# Altium PCB MOBO_Rev2.PcbDoc (part 1 of 2)
Units mil, origin at the board's own origin, x right, y up, seen from the top; angles counter-clockwise.
Board outline 3000 x 2999.58 mil, 4 copper layers (Top Layer, Layer 1, Layer 2, Bottom Layer), stack 23.756 mil thick; 114 components, 91 nets, 741 pads, 25 vias.
Unrouted connection lines stored in the file: 474.
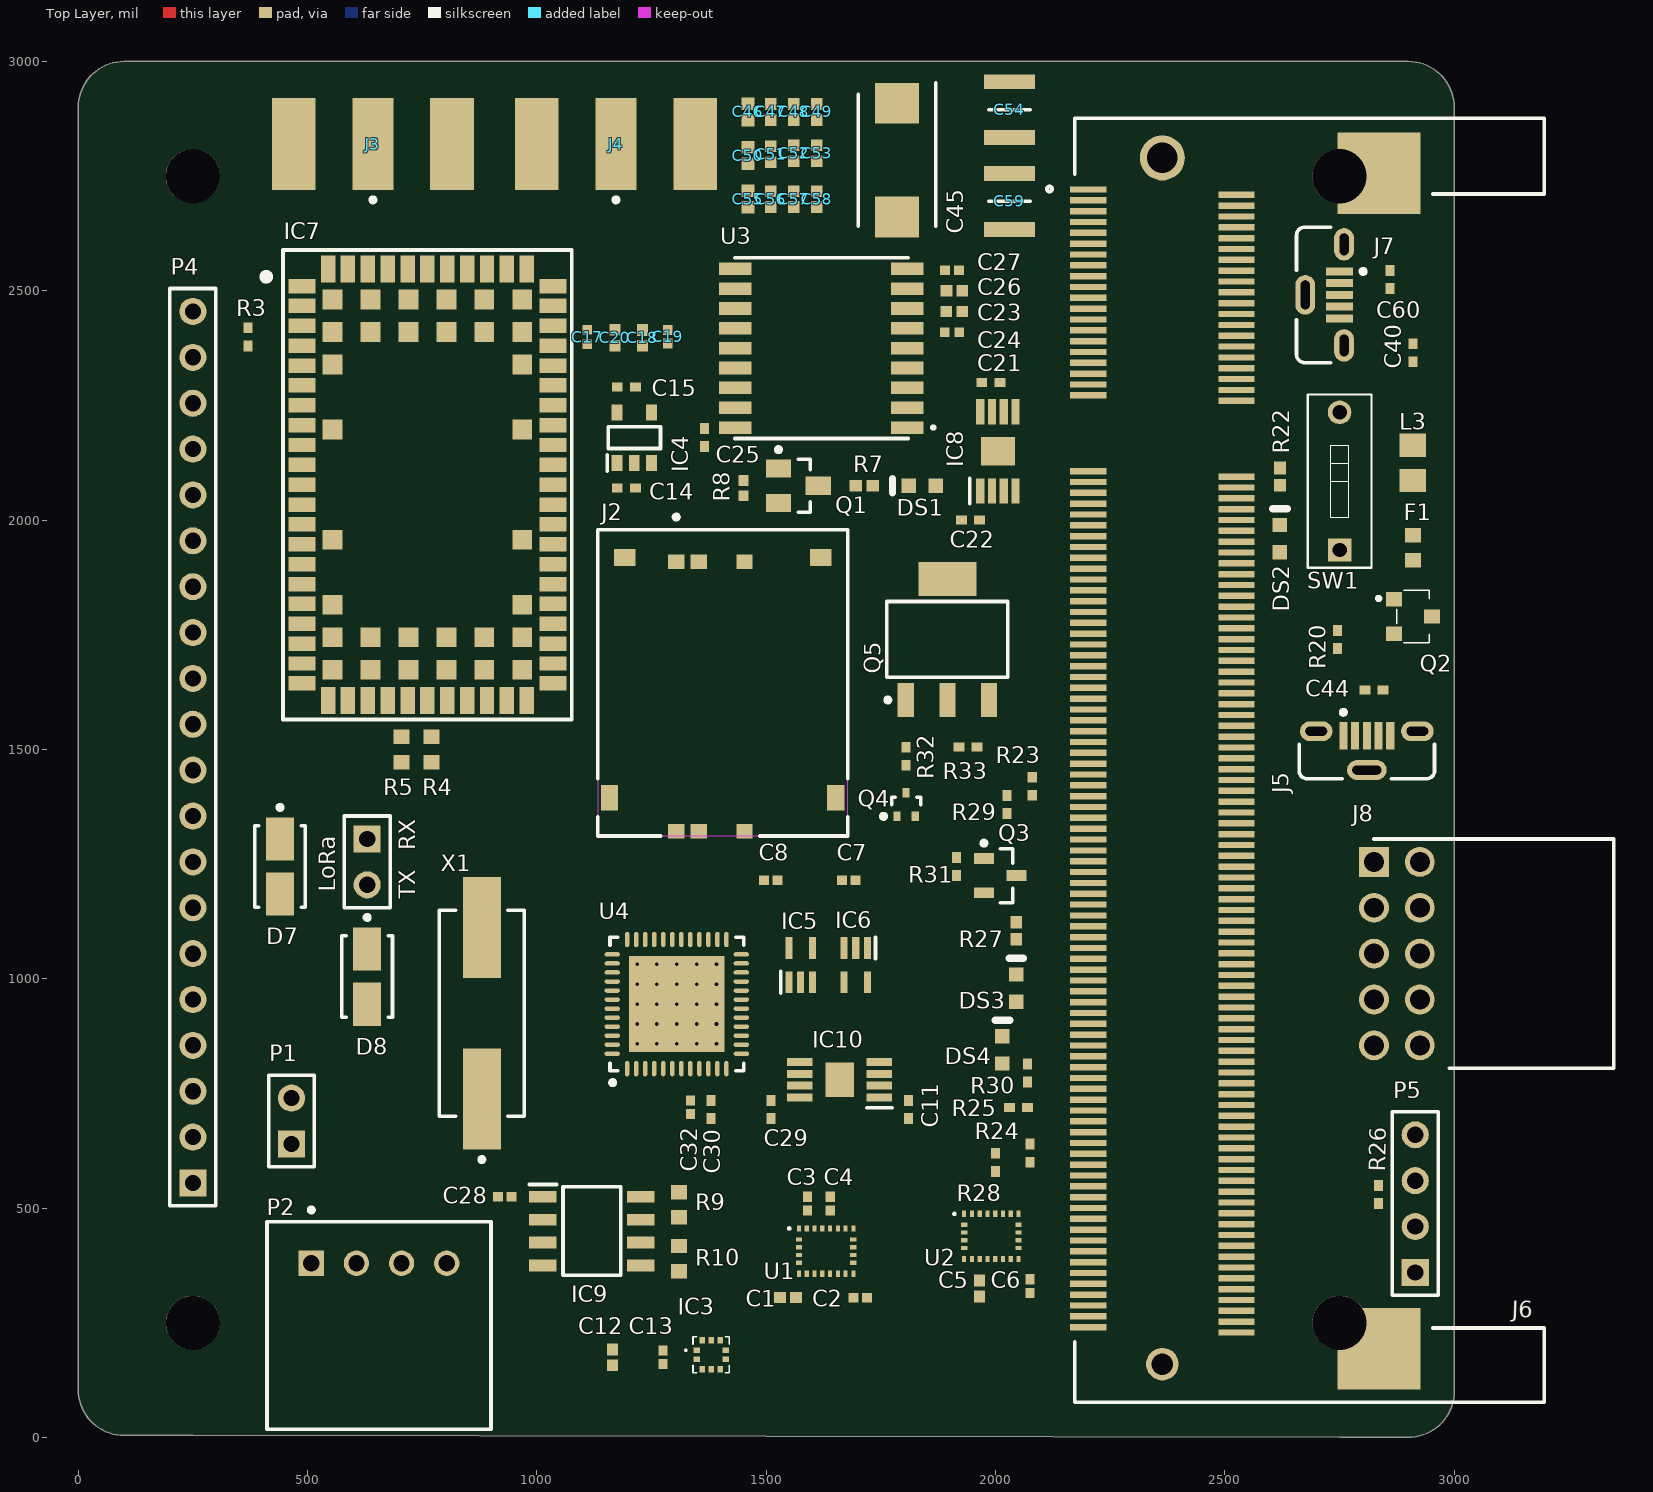
[diagram p0: Top Layer view]
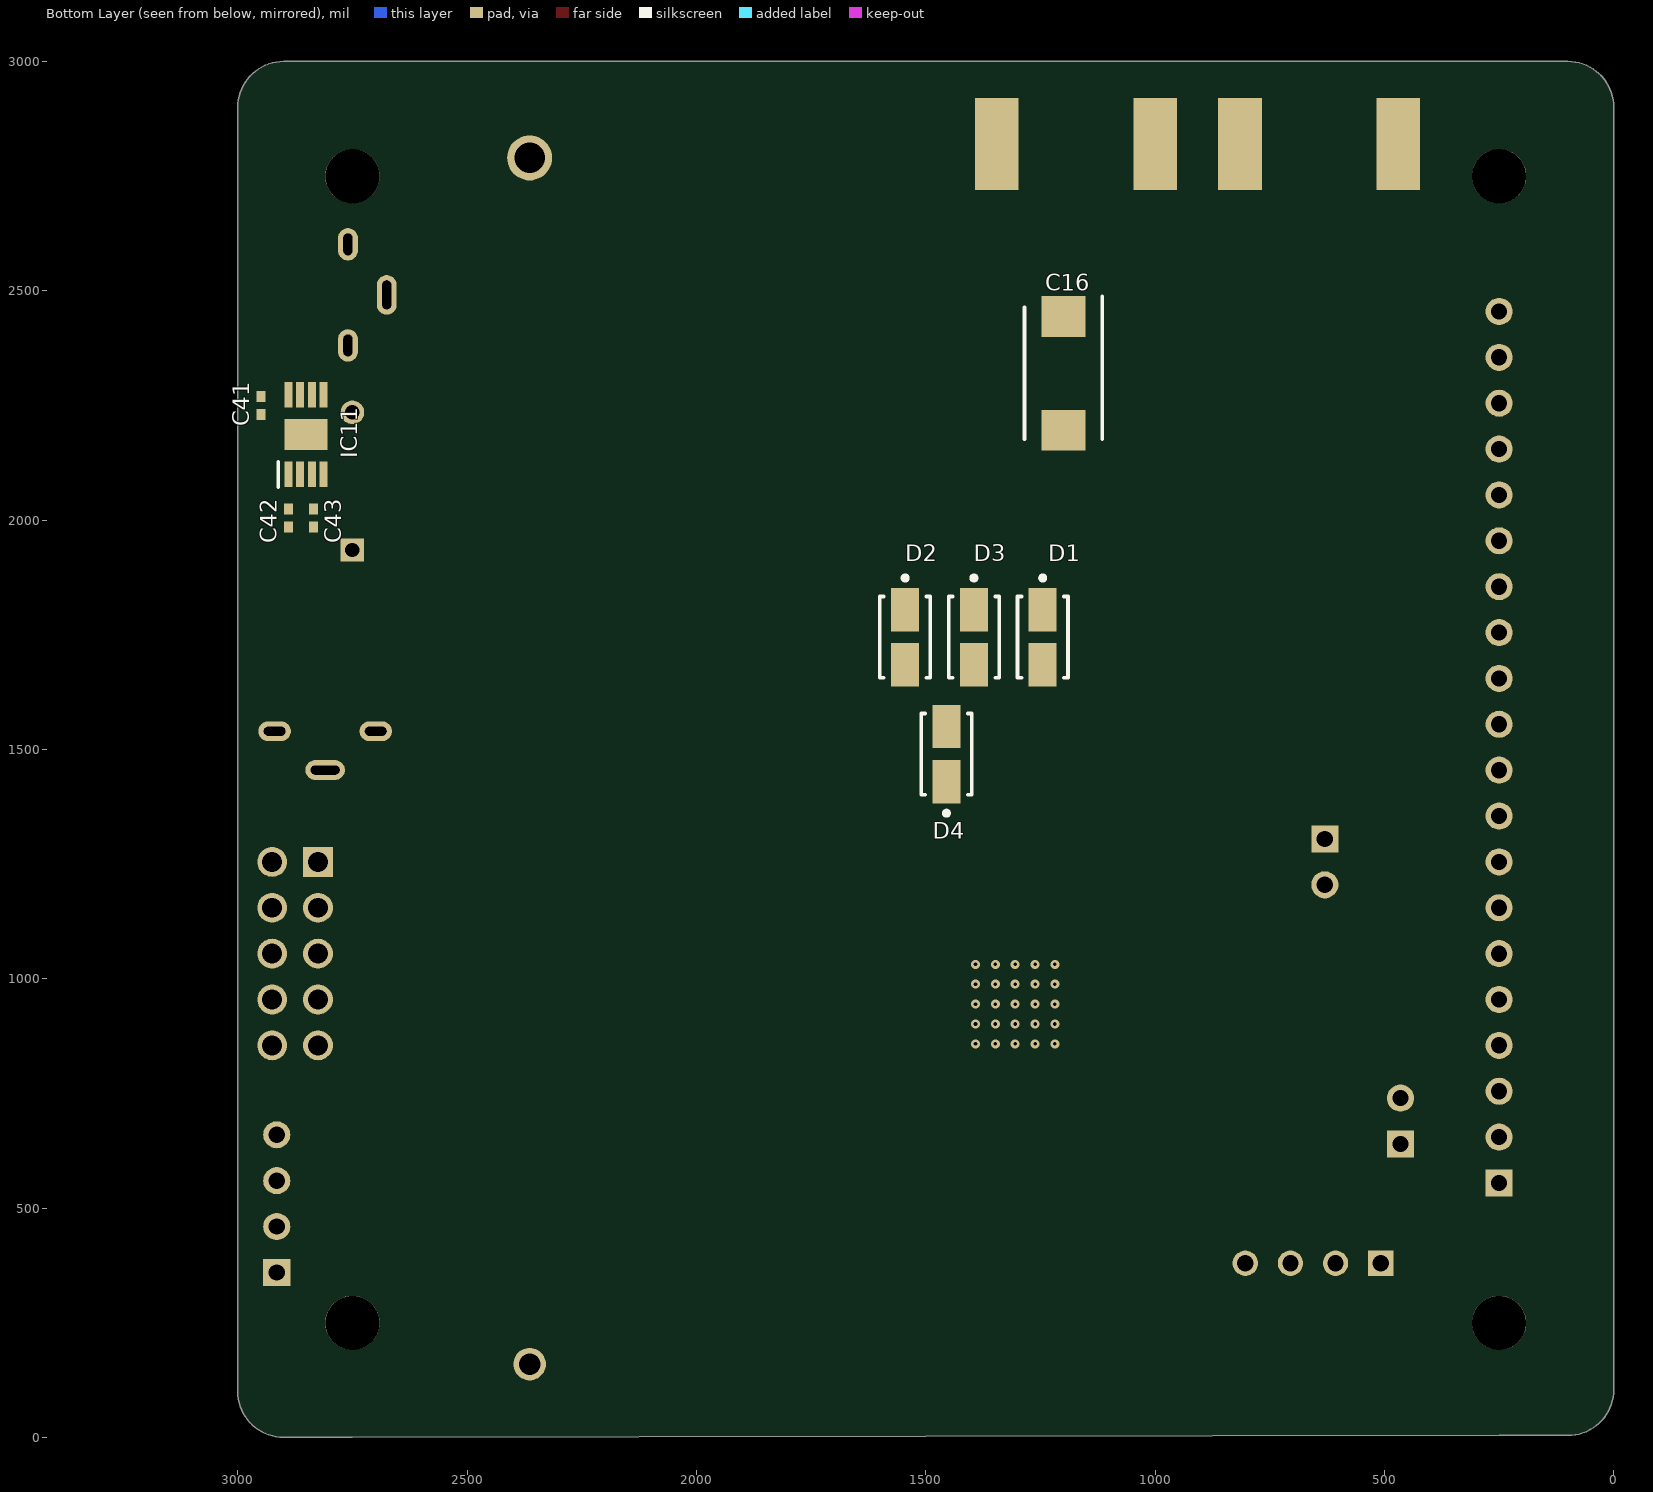
[diagram p1: Bottom Layer view, seen from below]

## Layer stack, top to bottom
Top Solder: solder mask 0.4, Solder Resist, Dk 3.5
Top Layer: signal copper 1.4
Dielectric 2: prepreg 2.8, PP-006, Dk 4.1
Layer 1: signal copper 1.378
Dielectric 1: dielectric 12.6, FR-4, Dk 4.8
Layer 2: signal copper 1.378
Dielectric 3: prepreg 2.8, PP-006, Dk 4.1
Bottom Layer: signal copper 1.4
Bottom Solder: solder mask 0.4, Solder Resist, Dk 3.5

## Board outline
2750,0.42 2900,0.42 ccw(c2900,100.42) 3000,100.42 3000,250 3000,2900 ccw(c2900,2900) 2900,3000 100,3000 ccw(c100,2900) 0,2900 0,104.58 ccw(c100,104.58) 100,4.58 250.01,4.58

## Design rules (kind name [scope] priority, off if disabled: settings)
Clearance [All] p1: gap=10 ignorepadtopadclearanceinfootprint=FALSE except(0: Arc-Hole Track-Hole SMDPad-Hole THPad-Hole Fill-Hole Poly-Hole Region-Hole Text-Hole; 5: Arc-Arc Arc-Track Track-Track SMDPad-SMDPad; 8: Arc-SMDPad Track-SMDPad SMDPad-Fill SMDPad-Poly SMDPad-Region; 22: Via-Hole)
HoleSize [All] p1: absolutevalues=TRUE maxlimit=100 minlimit=8 maxpercent=80.000 minpercent=20.000
PolygonConnect [All] p1: connectstyle=Relief reliefconductorwidth=10 reliefentries=4 polygonreliefangle="90 Angle" airgapwidth=10
RoutingVias [All] p1: holewidth=28 width=50 viastyle="Through Hole" minholewidth=28 minwidth=50 maxholewidth=28 maxwidth=50
SolderMaskExpansion [All] p1: expansion=4 istentingtop=FALSE
Width [All] p1: maxlimit=10 minlimit=10 preferedwidth=10
29 further rules are at their usual default settings.

## Classes and differential pairs
component class U_Power: C40 C41 C42 C43 C44 C45 C46 C47 C48 C49 C50 C51 C52 C53 C54 C55 C56 C57 C58 C59 DS2 F1 IC11 J5 L3 Q2 R20 R22 SW1
component class U_MAX14830ETM+: C11 C29 C30 C32 D7 D8 IC10 LoRa U4 X1
component class U_MAX3488AEGSA+: C28 IC9 P2 R9 R10
component class U_GPS_MAX-M8C-0-10: C21 C22 C23 C24 C25 C26 C27 DS1 IC8 J4 Q1 R7 R8 U3
component class U_Cell_SARA-G350-02S: C14 C15 C16 C17 C18 C19 C20 D1 D2 D3 D4 IC4 IC5 IC6 IC7 J2 J3 P1 R3 R4 R5
component class U_Barometer: C12 C13 IC3
component class U_Accelerometers: C1 C2 C3 C4 C5 C6 C7 C8 U1 U2
component class Top: C60 DS3 DS4 J6 J7 J8 P4 P5 Q3 Q4 Q5 R23 R24 R25 R26 R27 R28 R29 R30 R31 R32 R33

## Components (designator, comment, footprint, x,y, rotation, side; value= is the part's Value field where it differs from the comment)
C1 "GRM022R60J103KE19L" CAPC1005X55X25NL05T10 1547.68,305 r0 top
C2 "C0402C104Z4VAC7867" CAPC1005X60X30LL05T10 1704.96,305 r180 top
C3 "C0402C104Z4VAC7867" CAPC1005X60X30LL05T10 1590,510 r270 top
C4 "C0402C104Z4VAC7867" CAPC1005X60X30LL05T10 1640,510 r270 top
C5 "GRM022R60J103KE19L" CAPC1005X55X25NL05T10 1965,325 r90 top
C6 "C0402C104Z4VAC7867" CAPC1005X60X30LL05T10 2075,330.04 r90 top
C7 "C0402C104Z4VAC7867" CAPC1005X60X30LL05T10 1680,1215 r0 top
C8 "C0402C104Z4VAC7867" CAPC1005X60X30LL05T10 1510,1215 r0 top
C11 "CL05A106MP8NUB8" 0402 1810,715 r90 top value=10uF
C12 "GRM022R60J103KE19L" CAPC1005X55X25NL05T10 1165,175 r90 top
C13 "C0402C104Z4VAC7867" CAPC1005X60X30LL05T10 1275,175 r90 top
C14 "298D105X0010K2T" 0402 1195,2070 r180 top value=1uF
C15 "298D105X0010K2T" 0402 1195,2290 r180 top value=1uF
C16 "6TPC330MA" CAPPM7343X200N 1200,2320 r270 bottom
C17 "C0402C150J4GACTU" CAPC0402(1005)60_L 1110,2399.25 r90 top value=15pF
C18 "GRM022R60J103KE19L" CAPC1005X55X25NL05T10 1230,2397.68 r90 top
C19 "C0402C104Z4VAC7867" CAPC1005X60X30LL05T10 1285,2400.04 r90 top
C20 "C0402C560K5RACTU" CAPC1005X55N 1170,2397.68 r90 top
C21 "CL05A106MP8NUB8" 0402 1989.69,2300 r180 top value=10uF
C22 "CL05A106MP8NUB8" 0402 1945.31,2000 r0 top value=10uF
C23 "C0402C560K5RACTU" CAPC1005X55N 1910,2455 r0 top value=56pF
C24 "C0402C150J4GACTU" CAPC0402(1005)60_L 1905,2410 r0 top value=15pF
C25 "CL05A106MP8NUB8" 0402 1365,2180 r90 top value=10uF
C26 "GRM022R60J103KE19L" CAPC1005X55X25NL05T10 1910,2500 r180 top value=10nF
C27 "C0402C104Z4VACTU" CAPC1005X55X30LL05T10 1905,2545 r180 top value=100nF
C28 "C0402C104Z4VAC7867" CAPC1005X60X30LL05T10 930.04,525 r0 top
C29 "CL05A106MP8NUB8" 0402 1510,715 r90 top value=10uF
C30 "CL05A106MP8NUB8" 0402 1380,715.31 r90 top value=10uF
C32 "C0402C104Z4VAC7867" CAPC1005X60X30LL05T10 1335,720.04 r90 top
C40 "C1005X5R0J225M050BC" 0402 2910,2365 r270 top value=2.2uF
C41 "C1005X5R0J225M050BC" 0402 2949.49,2250 r90 bottom value=2.2uF
C42 "C1005X5R0J225M050BC" 0402 2889.49,2005 r90 bottom value=2.2uF
C43 "VJ0402Y104KXXCW1BC" 0402 2834.49,2005 r90 bottom value=100nF
C44 "CL05A106MP8NUB8" 0402 2825,1630 r180 top value=10uF
C45 "6TPC330MA" CAPPM7343X200N 1785,2785 r270 top value=330uF
C46 "C0402C150J4GACTU" CAPC1005X90N 1460,2890 r270 top value=15pF
C47 "C0402C560K5RACTU" CAPC1005X55N 1510,2890 r90 top value=56pF
C48 "C0402C103K8RACTU" CAPC1005X55N 1560,2890 r90 top value=10nF
C49 "C0402C104Z4VAC7867" CAPC1005X55N 1610,2890 r90 top value=100nF
C50 "C0402C150J4GACTU" CAPC1005X90N 1460,2795 r90 top value=15pF
C51 "C0402C560K5RACTU" CAPC1005X55N 1510,2797.68 r270 top value=56pF
C52 "C0402C103K8RACTU" CAPC1005X55N 1560,2800 r270 top value=10nF
C53 "C0402C104Z4VAC7867" CAPC1005X55N 1610,2800 r270 top value=100nF
C54 "GRM32ER60G337ME05L" CAPC3225X280N 2030,2895 r90 top value=330uF
C55 "C0402C150J4GACTU" CAPC1005X90N 1460,2700 r90 top value=15pF
C56 "C0402C560K5RACTU" CAPC1005X55N 1510,2700 r270 top value=56pF
C57 "C0402C103K8RACTU" CAPC1005X55N 1560,2700 r270 top value=10nF
C58 "C0402C104Z4VAC7867" CAPC1005X55N 1610,2700 r270 top value=100nF
C59 "GRM32ER60G337ME05L" CAPC3225X280N 2030,2695 r270 top value=330uF
C60 "CL05A106MP8NUB8" 0402 2860,2525 r270 top value=10uF
D1 "SMAJ30A-E3/61" VISH-DO-214AC-2_N 1245,1744.96 r270 bottom
D2 "SMAJ30A-E3/61" VISH-DO-214AC-2_N 1545,1745 r270 bottom
D3 "SMAJ30A-E3/61" VISH-DO-214AC-2_N 1395,1745 r270 bottom
D4 "SMAJ30A-E3/61" VISH-DO-214AC-2_N 1455,1490.04 r90 bottom
D7 "SMAJ30A-E3/61" VISH-DO-214AC-2_N 440,1245 r270 top
D8 "SMAJ30A-E3/61" VISH-DO-214AC-2_N 630,1005 r270 top
DS1 "HSMW-C191" AVAG-HSMW-C191_V 1840,2075 r180 top
DS2 "HSMW-C191" AVAG-HSMW-C191_V 2620,1960 r90 top
DS3 "HSMY-C190" AVAG-HSMX-C190_V 2045,980 r90 top
DS4 "HSMY-C190" AVAG-HSMX-C190_V 2015,845 r90 top
F1 "F0603E3R00FSTR" 1608[0603] 2910,1940 r90 top
IC3 "LPS22HDTR" LPS22HDTR 1380,180.48 r0 top
IC4 "XC6227C501MR-G" SOT95P280X130-5N 1212.4,2179.88 r90 top
IC5 "FXLP34P5X" SOT65P210X110-5N 1575,1030 r90 top
IC6 "FXLP34P5X" SOT65P210X110-5N 1695,1030 r270 top
IC7 "SARA-G350-02S" SARA-G350_1 446.38,1565.51 r0 top
IC8 "TPS7B8233QDGNRQ1" SOP65P490X110-9N 2005,2150 r90 top
IC9 "MAX3488AEGSA+" SOIC127P600X175-8N 1120,450 r0 top
IC10 "TPS7B8233QDGNRQ1" SOP65P490X110-9N 1660,780 r180 top
IC11 "MIC5357-SGYMME" SOP65P490X104-9N 2851.1,2186.61 r90 bottom
J2 "78800-0001" MOLX-78800-0001_V 1405,1620 r270 top
J3 "142-0701-801" CINC-142-0701-801_V 642.5,2820 r90 top
J4 "142-0701-801" CINC-142-0701-801_V 1172.5,2820 r90 top
J5 "105133-0001" MOLX-105133-0001_V 2809.41,1497.52 r0 top
J6 "1473005-4" 1473005-4_1 2363.58,1474.92 r90 top locked
J7 "105133-0001" MOLX-105133-0001_V 2717.52,2491.18 r270 top
J8 "SBH11-PBPC-D05-RA-BK" SHDRRA10W64P254_2X5_1270X910X880P 2825,1255 r270 top
L3 "MI0805K400R-10" LIRD-MI0805K400R-10_V 2910,2125 r90 top
LoRa "Header 2" HDR1X2 630,1305 r270 top
P1 "Header 2" HDR1X2 465,640 r90 top
P2 "S4B-XH-A(LF)(SN)" JST-S4B-XH-A(LF)(SN)_V 655.79,380 r0 top
P4 "Header 20" HDR1X20 250,555 r90 top locked
P5 "Header 4" HDR1X4 2915,360 r90 top
Q1 "FDV301N" FAIR-SOT23-3_V 1570,2075 r270 top
Q2 "SSM3J338R,LF" SSM3J332RLFT 2910,1790 r270 top
Q3 "2N7002P,215" NXP-SOT23_L 2010,1225 r0 top
Q4 "DMG1012T-7" DIOD-SOT523-3_V 1805,1380 r90 top
Q5 "BSP322P" INF-PG-SOT223_SC-73_M 1895,1740 r90 top
R3 "CRGP0402F100K" 0402 370,2399.69 r270 top value=100k
R4 "ESR03EZPJ332" 1608[0603] 770,1500 r270 top value=3.3K
R5 "ESR03EZPJ332" 1608[0603] 705,1500 r270 top value=3.3K
R7 "RC0402FR-07100RL" RESC1005X40X25ML05T10 1713.7,2075 r0 top
R8 "RC0402FR-07100KL" RESC1005X40X25NL05T10 1450,2070 r270 top
R9 "ESR03EZPJ121" 1608[0603] 1310,507.56 r270 top value=120
R10 "ESR03EZPJ121" 1608[0603] 1310,390 r90 top value=120
R20 "0402WGF1001TCE" 0402 2745,1740 r270 top value=1K
R22 "RC0402FR-07100RL" RESC1005X40X25ML05T10 2620,2095 r270 top
R23 "CRGP0402F100K" 0402 2080,1420 r90 top value=100k
R24 "CRGP0402F100K" 0402 2075,620 r90 top value=100k
R25 "0402WGF1801TCE" 0402 2050,720 r180 top value=1.8K
R26 "0402WGF1801TCE" 0402 2835,530 r270 top value=1.8K
R27 "RC0402FR-07100RL" RESC1005X40X25ML05T10 2045,1105 r270 top
R28 "CRGP0402F100K" 0402 2000,600 r90 top value=100k
R29 "CRGP0402F100K" 0402 2025,1380.31 r90 top value=100k
R30 "0402WGF1001TCE" 0402 2070,795 r90 top value=1K
R31 "CRGP0402F100K" 0402 1915,1245 r270 top value=100k
R32 "0402WGF1001TCE" 0402 1805,1485.31 r90 top value=1K
R33 "CRGP0402F100K" 0402 1940,1505 r0 top value=100k
SW1 "418117270901" 418117270901 2750,2085 r0 top
U1 "LSM9DS1TR" STM-LGA-24_3500X3000X1000 1630.75,406.54 r0 top
U2 "LSM9DS1TR" STM-LGA-24_3500X3000X1000 1990.75,438.46 r0 top
U3 "MAX-M8C-0-10" MAX-M8 1620,2375 r0 top
U4 "MAX14830ETM+" T4877+3_M 1305,945 r90 top
X1 "LFXTAL003260" ABRA-ABLS2-2_V 880,925 r90 top

## Footprints (in the part's own frame and the unit in brackets; to place one, negate y for a bottom-side part, rotate by r counter-clockwise, add the part's x,y. Pads: shape width x height; smd on the part's side, far side on the other; paste and mask are expansions set on the pad)
0402 [mm] "Chip Capacitor, Body 1.0x0.5mm, IPC High Density"
  rect 0.6x0.5 smd: 1(-0.5,0) 2(0.5,0)
  body extent -0.55,-0.3 0.55,0.3, height 1.3
1608[0603] [mm] "Chip Capacitor, Body 1.6x0.8mm, IPC High Density"
  rect 0.8x0.9 smd: 1(-0.7,0) 2(0.7,0)
  body extent -0.87,-0.48 0.87,0.48, height 1.3
1473005-4_1 [mm]
  rect 0.35x2 smd: 1(31.65,4.1) 2(31.35,-4.1) 3(31.05,4.1) 4(30.75,-4.1) 5(30.45,4.1) 6(30.15,-4.1) 7(29.85,4.1) 8(29.55,-4.1) 9(29.25,4.1) 10(28.95,-4.1) 11(28.65,4.1) 12(28.35,-4.1) 13(28.05,4.1) 14(27.75,-4.1) 15(27.45,4.1) 16(27.15,-4.1) 17(26.85,4.1) 18(26.55,-4.1) 19(26.25,4.1) 20(25.95,-4.1) 21(25.65,4.1) 22(25.35,-4.1) 23(25.05,4.1) 24(24.75,-4.1) 25(24.45,4.1) 26(24.15,-4.1) 27(23.85,4.1) 28(23.55,-4.1) 29(23.25,4.1) 30(22.95,-4.1) 31(22.65,4.1) 32(22.35,-4.1) 33(22.05,4.1) 34(21.75,-4.1) 35(21.45,4.1) 36(21.15,-4.1) 37(20.85,4.1) 38(20.55,-4.1) 39(20.25,4.1) 40(19.95,-4.1) 41(16.05,4.1) 42(15.75,-4.1) 43(15.45,4.1) 44(15.15,-4.1) 45(14.85,4.1) 46(14.55,-4.1) 47(14.25,4.1) 48(13.95,-4.1) 49(13.65,4.1) 50(13.35,-4.1) 51(13.05,4.1) 52(12.75,-4.1) 53(12.45,4.1) 54(12.15,-4.1) 55(11.85,4.1) 56(11.55,-4.1) 57(11.25,4.1) 58(10.95,-4.1) 59(10.65,4.1) 60(10.35,-4.1) 61(10.05,4.1) 62(9.75,-4.1) 63(9.45,4.1) 64(9.15,-4.1) 65(8.85,4.1) 66(8.55,-4.1) 67(8.25,4.1) 68(7.95,-4.1) 69(7.65,4.1) 70(7.35,-4.1) 71(7.05,4.1) 72(6.75,-4.1) 73(6.45,4.1) 74(6.15,-4.1) 75(5.85,4.1) 76(5.55,-4.1) 77(5.25,4.1) 78(4.95,-4.1) 79(4.65,4.1) 80(4.35,-4.1) 81(4.05,4.1) 82(3.75,-4.1) 83(3.45,4.1) 84(3.15,-4.1) 85(2.85,4.1) 86(2.55,-4.1) 87(2.25,4.1) 88(1.95,-4.1) 89(1.65,4.1) 90(1.35,-4.1) 91(1.05,4.1) 92(0.75,-4.1) 93(0.45,4.1) 94(0.15,-4.1) 95(-0.15,4.1) 96(-0.45,-4.1) 97(-0.75,4.1) 98(-1.05,-4.1) 99(-1.35,4.1) 100(-1.65,-4.1) 101(-1.95,4.1) 102(-2.25,-4.1) 103(-2.55,4.1) 104(-2.85,-4.1) 105(-3.15,4.1) 106(-3.45,-4.1) 107(-3.75,4.1) 108(-4.05,-4.1) 109(-4.35,4.1) 110(-4.65,-4.1) 111(-4.95,4.1) 112(-5.25,-4.1) 113(-5.55,4.1) 114(-5.85,-4.1) 115(-6.15,4.1) 116(-6.45,-4.1) 117(-6.75,4.1) 118(-7.05,-4.1) 119(-7.35,4.1) 120(-7.65,-4.1) 121(-7.95,4.1) 122(-8.25,-4.1) 123(-8.55,4.1) 124(-8.85,-4.1) 125(-9.15,4.1) 126(-9.45,-4.1) 127(-9.75,4.1) 128(-10.05,-4.1) 129(-10.35,4.1) 130(-10.65,-4.1) 131(-10.95,4.1) 132(-11.25,-4.1) 133(-11.55,4.1) 134(-11.85,-4.1) 135(-12.15,4.1) 136(-12.45,-4.1) 137(-12.75,4.1) 138(-13.05,-4.1) 139(-13.35,4.1) 140(-13.65,-4.1) 141(-13.95,4.1) 142(-14.25,-4.1) 143(-14.55,4.1) 144(-14.85,-4.1) 145(-15.15,4.1) 146(-15.45,-4.1) 147(-15.75,4.1) 148(-16.05,-4.1) 149(-16.35,4.1) 150(-16.65,-4.1) 151(-16.95,4.1) 152(-17.25,-4.1) 153(-17.55,4.1) 154(-17.85,-4.1) 155(-18.15,4.1) 156(-18.45,-4.1) 157(-18.75,4.1) 158(-19.05,-4.1) 159(-19.35,4.1) 160(-19.65,-4.1) 161(-19.95,4.1) 162(-20.25,-4.1) 163(-20.55,4.1) 164(-20.85,-4.1) 165(-21.15,4.1) 166(-21.45,-4.1) 167(-21.75,4.1) 168(-22.05,-4.1) 169(-22.35,4.1) 170(-22.65,-4.1) 171(-22.95,4.1) 172(-23.25,-4.1) 173(-23.55,4.1) 174(-23.85,-4.1) 175(-24.15,4.1) 176(-24.45,-4.1) 177(-24.75,4.1) 178(-25.05,-4.1) 179(-25.35,4.1) 180(-25.65,-4.1) 181(-25.95,4.1) 182(-26.25,-4.1) 183(-26.55,4.1) 184(-26.85,-4.1) 185(-27.15,4.1) 186(-27.45,-4.1) 187(-27.75,4.1) 188(-28.05,-4.1) 189(-28.35,4.1) 190(-28.65,-4.1) 191(-28.95,4.1) 192(-29.25,-4.1) 193(-29.55,4.1) 194(-29.85,-4.1) 195(-30.15,4.1) 196(-30.45,-4.1) 197(-30.75,4.1) 198(-31.05,-4.1) 199(-31.35,4.1) 200(-31.65,-4.1)
  rect 4.5x4.6 smd: 201(-32.55,-12) 202(32.55,-12)
  round 2.5 hole 1.7: 203(33.4,0)
  round 1.8 hole 1.2: 204(-33.4,0)
  silkscreen extent -35.5,-21.15 35.6,6.39, body extent -35.75,-1.1 35.75,5.33, height 17.34
418117270901 [mm] "01p, 2.54mm Pitch, Horizontal, Box Type, THT, raised Actuator, red, without Tape, Tube"
  rect 1.3x1.3 hole 0.8: 1(0,-3.81)
  round 1.3 hole 0.8: 2(0,3.81)
  silkscreen extent -1.77,-4.8 1.77,4.8, body extent -1.77,-4.8 1.77,4.8, height 6.5
ABRA-ABLS2-2_V [mm] "SMD, 2-Leads, Body 11.4x4.7mm, Height 3.3mm"
  rect 5.6x2.1 smd: 1(-4.75,0) 2(4.75,0)
  silkscreen extent -8.22,-2.35 5.7,2.35, body extent -5.7,-2.35 5.7,2.35, height 3.3
AVAG-HSMW-C191_V [mm] "SMD, 2-Leads, Body 1.6x0.8mm"
  rect 0.8x0.8 smd: 1(-0.75,0) 2(0.75,0)
  silkscreen extent 1.65,-0.4 1.65,0.4, body extent -0.8,-0.4 0.8,0.4, height 0.7
AVAG-HSMX-C190_V [mm] "SMD, 2-Leads, Body 1.6x0.8mm, Height 0.9mm"
  rect 0.8x0.8 smd: 1(-0.75,0) 2(0.75,0)
  silkscreen extent 1.65,-0.4 1.65,0.4, body extent -0.8,-0.4 0.8,0.4, height 0.9
CAPC0402(1005)60_L [mm] "Chip Capacitor, Body 1.0x0.5mm, Height 0.6mm, IPC High Density"
  rect 0.52x0.52 smd: 1(-0.4,0) 2(0.4,0)
  body extent -0.55,-0.3 0.55,0.3, height 0.6
CAPC1005X55N [mm]
  rect 0.65x0.62 smd: 1(-0.44,0) 2(0.44,0)
  body extent -0.5,-0.25 0.5,0.25, height 0.55
CAPC1005X55X25NL05T10 [mm] "Chip Capacitor, 2-Leads, Body 1.00x0.50mm, IPC Medium Density"
  rect 0.66x0.62 smd: 1(-0.44,0) 2(0.44,0)
  body extent -0.53,-0.28 0.53,0.27, height 0.55
CAPC1005X55X30LL05T10 [mm] "Chip Capacitor, 2-Leads, Body 1.00x0.50mm, IPC High Density"
  rect 0.56x0.52 smd: 1(-0.38,0) 2(0.38,0)
  body extent -0.53,-0.28 0.53,0.28, height 0.55
CAPC1005X60X30LL05T10 [mm] "Chip Capacitor, 2-Leads, Body 1.00x0.50mm, IPC High Density"
  rect 0.56x0.52 smd: 1(-0.38,0) 2(0.38,0)
  body extent -0.53,-0.28 0.53,0.28, height 0.6
CAPC1005X90N [mm]
  rect 0.69x0.72 smd: 1(-0.46,0) 2(0.46,0)
  body extent -0.5,-0.25 0.5,0.25, height 0.9
CAPC3225X280N [mm]
  rect 0.82x2.82 smd: 1(-1.55,0) 2(1.55,0)
  silkscreen extent 0,-1.15 0,1.15, body extent -1.6,-1.25 1.6,1.25, height 2.8
CAPPM7343X200N [mm]
  rect 2.25x2.45 smd: 1(-3.15,0) 2(3.15,0)
  silkscreen extent -4.27,-2.15 3.65,2.15, body extent -3.65,-2.15 3.65,2.15, height 2
CINC-142-0701-801_V [mil] "SMA Connector, 5-Leads, Body 14.275x9.525mm"
  rect 200x90 smd: 1(0,0)
  rect 200x95 smd: 2(0,172.5) 3(0,-172.5)
  rect 200x95 smd far side: 4(0,172.5)
  rect 200x95 smd far side mask+4: 5(0,-172.5)
  silkscreen extent -127,-5 -117,5, body extent -87,-187 475,188, height 171
DIOD-SOT523-3_V [mm] "SOT523, 3-Leads, Body 1.6x0.8mm, Pitch 0.50mm"
  rect 0.51x0.4 smd: 1(-0.65,0.5) 2(-0.65,-0.5) 3(0.65,0)
  silkscreen extent -0.77,-0.8 0.4,1.37, body extent -0.4,-0.8 0.4,0.8, height 0.86
FAIR-SOT23-3_V [mm] "SOT23, 3-Leads, Body 2.92x1.3mm, Pitch 0.95mm"
  rect 1x1.4 smd: 1(-0.95,-1.1) 2(0.95,-1.1) 3(0,1.1)
  silkscreen extent -2.12,-1.22 1.46,0.65, body extent -1.46,-0.65 1.46,0.65, height 1.2
HDR1X2 [mm] "Connector; Header; 2 Position"
  rect 1.5x1.5 hole 0.9: 1(0,0)
  round 1.5 hole 0.9: 2(2.54,0)
  silkscreen extent -1.27,-1.27 3.81,1.27
HDR1X4 [mm] "Connector; Header; 4 Position"
  rect 1.5x1.5 hole 0.9: 1(0,0)
  round 1.5 hole 0.9: 2(2.54,0) 3(5.08,0) 4(7.62,0)
  silkscreen extent -1.27,-1.27 8.89,1.27
HDR1X20 [mm] "Connector; Header; 20 Position"
  rect 1.5x1.5 hole 0.9: 1(0,0)
  round 1.5 hole 0.9: 2(2.54,0) 3(5.08,0) 4(7.62,0) 5(10.16,0) 6(12.7,0) 7(15.24,0) 8(17.78,0) 9(20.32,0) 10(22.86,0) 11(25.4,0) 12(27.94,0) 13(30.48,0) 14(33.02,0) 15(35.56,0) 16(38.1,0) 17(40.64,0) 18(43.18,0) 19(45.72,0) 20(48.26,0)
  silkscreen extent -1.27,-1.27 49.53,1.27
INF-PG-SOT223_SC-73_M [mm] "SOT223, 4-Leads, Body 6.5x3.5mm, Pitch 2.3mm, IPC Low Density"
  rect 1.9x0.9 smd: 1(-3.35,2.3) 2(-3.35,0) 3(-3.35,-2.3)
  rect 1.9x3.2 smd: 4(3.35,0)
  silkscreen extent -3.47,-3.35 2.1,3.42, body extent -1.85,-3.35 1.85,3.35, height 1.8
JST-S4B-XH-A(LF)(SN)_V [mm] "Header, 4-Leads, Body 12.4x11.5mm, Pitch 2.5mm"
  rect 1.4x1.4 hole 0.9: 1(-3.75,0)
  round 1.4 hole 0.9: 2(-1.25,0) 3(1.25,0) 4(3.75,0)
  silkscreen extent -6.2,-9.2 6.2,3.08, body extent -6.2,-9.2 6.2,2.3, height 6.15
LIRD-MI0805K400R-10_V [mm] "SMD, 2-Leads, Body 2x1.25mm"
  rect 1.285x1.47 smd: 1(-0.972,0) 2(0.972,0)
  body extent -1,-0.63 1,0.63, height 1.1
LPS22HDTR [mm]
  rect 0.35x0.3 smd: 1(-0.8,0.25) 2(-0.8,-0.25) 6(0.8,-0.25) 7(0.8,0.25)
  rect 0.3x0.35 smd: 3(-0.5,-0.8) 4(0,-0.8) 5(0.5,-0.8) 8(0.5,0.8) 9(0,0.8) 10(-0.5,0.8)
  silkscreen extent -1.45,-1 1,1, body extent -1,-1 1,1, height 0.9
MAX-M8 [mm]
  rect 1.8x0.7 smd: 1(4.75,-4.4) 2(4.75,-3.3) 3(4.75,-2.2) 4(4.75,-1.1) 5(4.75,0) 6(4.75,1.1) 7(4.75,2.2) 8(4.75,3.3) 9(4.75,4.4) 10(-4.75,4.4) 11(-4.75,3.3) 12(-4.75,2.2) 13(-4.75,1.1) 14(-4.75,0) 15(-4.75,-1.1) 16(-4.75,-2.2) 17(-4.75,-3.3) 18(-4.75,-4.4)
  silkscreen extent -4.8,-5 6.27,5
MOLX-78800-0001_V [mm] "SIM Card Socket, 6-Leads, Body 16.96x13.85mm"
  rect 0.8x0.9 smd: C1(-7.355,-2.57) C2(-7.355,-1.33) C3(-7.355,1.21) C5(7.585,-2.57) C6(7.585,-1.33) C7(7.585,1.21)
  rect 0.95x1.2 smd: S1(-7.585,-5.42) S2(-7.585,5.43)
  rect 1.4x0.95 smd: S3(5.725,6.26) S4(5.725,-6.26)
  Top Layer keep-out region: -9.125,-6.92 7.835,-6.92 7.835,6.93 -9.125,6.93
  silkscreen extent -9.95,-6.92 7.84,6.93, body extent -9.12,-6.92 7.84,6.93, height 1.51
MOLX-105133-0001_V [mm] "Micro USB B, 5-Leads, Pitch 0.65mm"
  rect 0.45x1.5 smd: 1(-1.3,0.825) 2(-0.65,0.825) 3(0,0.825) 4(0.65,0.825) 5(1.3,0.825)
  oval 1.8x1.1 hole 0.5 slot 1.2 at 0 deg: 6(-2.8,1.075) 7(2.8,1.075)
  oval 2.2x1.1 hole 0.5 slot 1.6 at 0 deg: 8(0,-1.075)
  silkscreen extent -3.75,-1.56 3.75,2.25, body extent -4.02,-2.22 4,2.23, height 7.51
NXP-SOT23_L [mm] "SOT23, 3-Leads, Body 3x1.4mm, Pitch 0.95mm, IPC High Density"
  rect 1.1x0.6 smd: 1(-0.9,0.95) 2(-0.9,-0.95) 3(0.9,0)
  silkscreen extent -1.02,-1.5 0.7,1.92, body extent -0.7,-1.5 0.7,1.5, height 1.1
RESC1005X40X25ML05T10 [mm] "Chip Resistor, 2-Leads, Body 1.00x0.50mm, IPC Low Density"
  rect 0.7x0.65 smd: 1(-0.475,0) 2(0.475,0)
  body extent -0.53,-0.27 0.53,0.28, height 0.4
RESC1005X40X25NL05T10 [mm] "Chip Resistor, 2-Leads, Body 1.00x0.50mm, IPC Medium Density"
  rect 0.6x0.55 smd: 1(-0.425,0) 2(0.425,0)
  body extent -0.53,-0.27 0.53,0.28, height 0.4
SARA-G350_1 [mm]
  rect 1.5x0.8 smd: 1(1.05,24) 2(1.05,22.9) 3(1.05,21.8) 4(1.05,20.7) 5(1.05,19.6) 6(1.05,18.5) 7(1.05,17.4) 8(1.05,16.3) 9(1.05,15.2) 10(1.05,14.1) 11(1.05,13) 12(1.05,11.9) 13(1.05,10.8) 14(1.05,9.7) 15(1.05,8.6) 16(1.05,7.5) 17(1.05,6.4) 18(1.05,5.3) 19(1.05,4.2) 20(1.05,3.1) 21(1.05,2) 33(14.95,2) 34(14.95,3.1) 35(14.95,4.2) 36(14.95,5.3) 37(14.95,6.4) 38(14.95,7.5) 39(14.95,8.6) 40(14.95,9.7) 41(14.95,10.8) 42(14.95,11.9) 43(14.95,13) 44(14.95,14.1) 45(14.95,15.2) 46(14.95,16.3) 47(14.95,17.4) 48(14.95,18.5) 49(14.95,19.6) 50(14.95,20.7) 51(14.95,21.8) 52(14.95,22.9) 53(14.95,24)
  rect 0.8x1.5 smd: 22(2.5,1.05) 23(3.6,1.05) 24(4.7,1.05) 25(5.8,1.05) 26(6.9,1.05) 27(8,1.05) 28(9.1,1.05) 29(10.2,1.05) 30(11.3,1.05) 31(12.4,1.05) 32(13.5,1.05) 54(13.5,24.95) 55(12.4,24.95) 56(11.3,24.95) 57(10.2,24.95) 58(9.1,24.95) 59(8,24.95) 60(6.9,24.95) 61(5.8,24.95) 62(4.7,24.95) 63(3.6,24.95) 64(2.5,24.95)
  rect 1.1x1.1 smd: 65(2.75,23.25) 66(4.85,23.25) 67(6.95,23.25) 68(9.05,23.25) 69(11.15,23.25) 70(13.25,23.25) 71(2.75,21.45) 72(4.85,21.45) 73(6.95,21.45) 74(9.05,21.45) 75(11.15,21.45) 76(13.25,21.45) 77(2.75,19.65) 78(13.25,19.65) 79(2.75,16.05) 80(13.25,16.05) 81(2.75,9.95) 82(13.25,9.95) 83(2.75,6.35) 84(13.25,6.35) 85(2.75,4.55) 86(4.85,4.55) 87(6.95,4.55) 88(9.05,4.55) 89(11.15,4.55) 90(13.25,4.55) 91(2.75,2.75) 92(4.85,2.75) 93(6.95,2.75) 94(9.05,2.75) 95(11.15,2.75) 96(13.25,2.75)
  silkscreen extent -1.1,0 16,26
SHDRRA10W64P254_2X5_1270X910X880P [mm]
  rect 1.65x1.65 hole 1.1: 1(0,0)
  round 1.65 hole 1.1: 2(0,2.54) 3(2.54,0) 4(2.54,2.54) 5(5.08,0) 6(5.08,2.54) 7(7.62,0) 8(7.62,2.54) 9(10.16,0) 10(10.16,2.54)
  silkscreen extent -1.27,0 11.43,13.28, body extent -1.27,-0.32 11.43,13.28, height 8.8
SOIC127P600X175-8N [mm]
  rect 1.525x0.65 smd: 1(-2.712,1.905) 2(-2.712,0.635) 3(-2.712,-0.635) 4(-2.712,-1.905) 5(2.712,-1.905) 6(2.712,-0.635) 7(2.712,0.635) 8(2.712,1.905)
  silkscreen extent -3.47,-2.45 1.6,2.58, body extent -3,-2.45 3,2.45, height 1.75
SOP65P490X104-9N [mm]
  rect 1.4x0.45 smd: 1(-2.2,0.975) 2(-2.2,0.325) 3(-2.2,-0.325) 4(-2.2,-0.975) 5(2.2,-0.975) 6(2.2,-0.325) 7(2.2,0.325) 8(2.2,0.975)
  rect 1.73x2.36 smd: 9(0,0)
  silkscreen extent -2.9,1.55 -1.5,1.55, body extent -2.45,-1.5 2.45,1.5, height 1.04
SOP65P490X110-9N [mm]
  rect 1.4x0.45 smd: 1(-2.2,0.975) 2(-2.2,0.325) 3(-2.2,-0.325) 4(-2.2,-0.975) 5(2.2,-0.975) 6(2.2,-0.325) 7(2.2,0.325) 8(2.2,0.975)
  rect 1.57x1.89 smd: 9(0,0)
  silkscreen extent -2.9,1.55 -1.5,1.55, body extent -2.45,-1.5 2.45,1.5, height 1.1
SOT65P210X110-5N [mm]
  rect 1.2x0.4 smd: 1(-0.95,0.65) 2(-0.95,0) 3(-0.95,-0.65) 4(0.95,-0.65) 5(0.95,0.65)
  silkscreen extent -1.55,1.1 -0.35,1.1, body extent -1.05,-1 1.05,1, height 1.1
SOT95P280X130-5N [mm]
  rect 0.9x0.6 smd: 1(-1.4,0.95) 2(-1.4,0) 3(-1.4,-0.95) 4(1.4,-0.95) 5(1.4,0.95)
  silkscreen extent -1.85,-1.45 0.6,1.5, body extent -1.4,-1.45 1.4,1.45, height 1.3
SSM3J332RLFT [mm]
  rect 0.8x0.9 smd: 1(-0.95,-1.05) 2(0.95,-1.05) 3(0,1.05)
  silkscreen extent -1.45,-2 1.45,0.9
STM-LGA-24_3500X3000X1000 [mm] "LGA, 24-Leads, Body 3.65x3.15mm, Pitch 0.43mm"
  rect 0.23x0.35 smd mask+0.05: 1(-1.505,1.25) 6(-1.505,-1.25) 7(-1.075,-1.25) 8(-0.645,-1.25) 9(-0.215,-1.25) 10(0.215,-1.25) 11(0.645,-1.25) 12(1.075,-1.25) 13(1.505,-1.25) 18(1.505,1.25) 19(1.075,1.25) 20(0.645,1.25) 21(0.215,1.25) 22(-0.215,1.25) 23(-0.645,1.25) 24(-1.075,1.25)
  rect 0.35x0.23 smd mask+0.05: 2(-1.505,0.645) 3(-1.505,0.215) 4(-1.505,-0.215) 5(-1.505,-0.645) 14(1.505,-0.645) 15(1.505,-0.215) 16(1.505,0.215) 17(1.505,0.645)
  silkscreen extent -2.11,1.19 -1.98,1.31, body extent -1.82,-1.57 1.83,1.58, height 1.03
T4877+3_M [mm] "QFN, 48-Leads, Body 7x7mm, Pitch 0.5mm, Thermal Pad 5.3x5.3mm, IPC Low Density"
  oval 0.85x0.25 smd: 1(-3.575,2.75) 2(-3.575,2.25) 3(-3.575,1.75) 4(-3.575,1.25) 5(-3.575,0.75) 6(-3.575,0.25) 7(-3.575,-0.25) 8(-3.575,-0.75) 9(-3.575,-1.25) 10(-3.575,-1.75) 11(-3.575,-2.25) 12(-3.575,-2.75) 25(3.575,-2.75) 26(3.575,-2.25) 27(3.575,-1.75) 28(3.575,-1.25) 29(3.575,-0.75) 30(3.575,-0.25) 31(3.575,0.25) 32(3.575,0.75) 33(3.575,1.25) 34(3.575,1.75) 35(3.575,2.25) 36(3.575,2.75)
  oval 0.25x0.85 smd: 13(-2.75,-3.575) 14(-2.25,-3.575) 15(-1.75,-3.575) 16(-1.25,-3.575) 17(-0.75,-3.575) 18(-0.25,-3.575) 19(0.25,-3.575) 20(0.75,-3.575) 21(1.25,-3.575) 22(1.75,-3.575) 23(2.25,-3.575) 24(2.75,-3.575) 37(2.75,3.575) 38(2.25,3.575) 39(1.75,3.575) 40(1.25,3.575) 41(0.75,3.575) 42(0.25,3.575) 43(-0.25,3.575) 44(-0.75,3.575) 45(-1.25,3.575) 46(-1.75,3.575) 47(-2.25,3.575) 48(-2.75,3.575)
  rect 5.3x5.3 smd: 49(0,0)
  silkscreen extent -4.47,-3.7 3.7,3.7, body extent -3.55,-3.55 3.55,3.55, height 0.8
VISH-DO-214AC-2_N [mm] "DO-214AC, 2-Leads, Body 4.5x2.79mm, IPC Medium Density"
  rect 2.4x1.55 smd: 1(-1.525,0) 2(1.525,0)
  silkscreen extent -3.4,-1.4 2.25,1.4, body extent -2.25,-1.4 2.25,1.39, height 2.29

## Part data
C1 C5 C12 C18 C26: library part CMP-2008-04044-1, Manufacturer=Murata, Part Number=GRM022R60J103KE19L
  C1 C5 C12 C18: spec=10nF
C2 C3 C4 C6 C7 C8 C13 C19 C28 C32: library part CMP-2008-02369-1, Manufacturer=Kemet, Part Number=C0402C104Z4VAC7867, spec=100nF
C11 C14 C15 C21 C22 C25 C29 C30 C40 C41 C42 C43 C44 C60: library part Cap, "Capacitor", LatestRevisionDate=17-Jul-2002, LatestRevisionNote="Re-released for DXP Platform.", PackageDescription="Radial Cap, Thru-Hole; 2 Leads; 0.3 in Pin Spacing", PackageReference=RAD-0.3, Published=8-Jun-2000, Publisher="Altium Limited"
C16: "Capacitor Polarised", Manufacturer_Name=Panasonic, Mouser Part Number=667-6TPC330MA, RS Part Number=7887368P, Datasheet Link=https://industrial.panasonic.com/cdbs/www-data/pdf/AAA8000/AAA8000C68.pdf, Height=2mm, Manufacturer_Part_Number=6TPC330MA, Mouser Price/Stock=https://www.mouser.com/Search/Refine.aspx?Keyword=667-6TPC330MA, RS Price/Stock=http://au.rs-online.com/web/p/products/7887368P, spec=330uF
C17 C24: library part CMP-1034-00802-1, "CAP 15pF 16V ±5% 0402 (1005 Metric) Thickness 0.6mm SMD", Case-EIA=0402, Case-Metric=1005, Rated Voltage="16 V", Tolerance=Â±5%, Max Thickness="0.6 mm", Technology=SMT
C20 C23 C47 C51 C56: "Capacitor", Manufacturer_Name=Kemet, Mouser Part Number=80-C0402C560K5RACTU, Datasheet Link=https://content.kemet.com/datasheets/KEM_C1002_X7R_SMD.pdf, Height=0.55mm, Manufacturer_Part_Number=C0402C560K5RACTU
  C20: Mouser Price/Stock=https://www.mouser.com/Search/Refine.aspx?Keyword=80-C0402C560K5RACTU, spec=56pF
  C23 C47 C51 C56: Arrow Part Number=C0402C560K5RACTU, Mouser Price/Stock=https://www.mouser.co.uk/ProductDetail/KEMET/C0402C560K5RACTU?qs=gt1LBUVyoHmQZW5v3ySgNQ%3D%3D
C27: library part CMP-2008-03088-1, Manufacturer=Kemet, Part Number=C0402C104Z4VACTU
C45: "Capacitor Polarised", Manufacturer_Name=Panasonic, Mouser Part Number=667-6TPC330MA, Arrow Part Number=6TPC330MA, Arrow Price/Stock=https://www.arrow.com/en/products/6tpc330ma/panasonic, Datasheet Link=https://industrial.panasonic.com/cdbs/www-data/pdf/AAA8000/AAA8000C68.pdf, Height=2mm, Manufacturer_Part_Number=6TPC330MA, Mouser Price/Stock=https://www.mouser.co.uk/ProductDetail/Panasonic/6TPC330MA?qs=OE1iw1LrrPEq6z1np%252BZymw%3D%3D
C46 C50 C55: "Capacitor", Manufacturer_Name=Kemet, Mouser Part Number=80-C0402C150J4G, Arrow Part Number=C0402C150J4GACTU, Arrow Price/Stock=https://www.arrow.com/en/products/c0402c150j4gactu/kemet-corporation, Datasheet Link=https://content.kemet.com/datasheets/KEM_C1002_X7R_SMD.pdf, Height=0.55mm, Manufacturer_Part_Number=C0402C150J4GACTU, Mouser Price/Stock=https://www.mouser.com/Search/Refine.aspx?Keyword=80-C0402C150J4G
C48 C52 C57: "Capacitor", Manufacturer_Name=Kemet, Mouser Part Number=80-C0402C103K8R, Arrow Part Number=C0402C103K8RACTU, Arrow Price/Stock=https://www.arrow.com/en/products/c0402c103k8ractu/kemet-corporation, Datasheet Link=https://content.kemet.com/datasheets/KEM_C1002_X7R_SMD.pdf, Height=0.55mm, Manufacturer_Part_Number=C0402C103K8RACTU, Mouser Price/Stock=https://www.mouser.co.uk/ProductDetail/KEMET/C0402C103K8RACTU?qs=JAINH4q0Y0HkMNTUebnT7w%3D%3D
C49 C53 C58: library part C0402C560K5RACTU, "Capacitor", Manufacturer_Name=Kemet, Mouser Part Number=80-C0402C560K5RACTU, Arrow Part Number=C0402C560K5RACTU, Datasheet Link=https://content.kemet.com/datasheets/KEM_C1002_X7R_SMD.pdf, Height=0.55mm, Manufacturer_Part_Number=C0402C560K5RACTU, Mouser Price/Stock=https://www.mouser.co.uk/ProductDetail/KEMET/C0402C560K5RACTU?qs=gt1LBUVyoHmQZW5v3ySgNQ%3D%3D
C54 C59: "Capacitor", Manufacturer_Name="Murata Electronics", Mouser Part Number=81-GRM32ER60G337ME5L, Arrow Part Number=GRM32ER60G337ME05L, Arrow Price/Stock=https://www.arrow.com/en/products/grm32er60g337me05l/murata-manufacturing, Datasheet Link=https://componentsearchengine.com/Datasheets/2/GRM32ER60G337ME05L.pdf, Height=2.8mm, Manufacturer_Part_Number=GRM32ER60G337ME05L, Mouser Price/Stock=https://www.mouser.co.uk/ProductDetail/Murata-Electronics/GRM32ER60G337ME05L?qs=MzgNgRTiRUU9wX46aOSi8Q%3D%3D
D1 D2 D3 D4 D7 D8: library part CMP-0548-00228-2, "Transient Voltage Suppressor, 6.40 to 231 V, 30 V Stand-off Voltage, Uni-Directional, -55 to 155 degC, 2-pin DO-214AC, Pb-Free, Tape and Reel", Manufacturer="Vishay Semiconductor", Operating Junction and Storage Temperature Range="-55 to 150 degC", ComponentLink1Description="Manufacturer URL", ComponentLink1URL=http://www.vishay.com/, ComponentLink2Description=Datasheet, ComponentLink2URL=http://www.vishay.com/docs/88390/smaj50a.pdf, ComponentLink3Description="Package Specification", ComponentLink3URL=http://www.vishay.com/docs/88390/smaj50a.pdf, DatasheetVersion=12/8/2013, ID (uA)=1, IFSM="40 A", Mounting Technology="Surface Mount", PackageDescription="2-Pin DO-214AC (SMA), Body 4.245 x 2.665 mm", PackageReference=DO-214AC-2, Packing="Tape and Reel", PartNumber=SMAJ30A-E3/61, PPPM (W)="400, 300", RoHS=TRUE, VBR Uni-Directional (V)="6.4 to 231", VWM (V)=30
DS1 DS2: library part CMP-1744-00001-1, "LED Uni-Color White, 78 mW, 20 mA, -40 to 85 degC, 2-Pin SMD, RoHS, Tape and Reel", Current Rating="300 mA", Max Operating Temperature="85 degC", Min Operating Temperature="-20 degC", Package Quantity=560, ComponentLink1Description="Manufacturer URL", ComponentLink1URL=http://www.avagotech.com/, ComponentLink2Description=Datasheet, ComponentLink2URL=http://docs.avagotech.com/docs/AV02-0186EN, Contact Finish=Silver, Contact Material=Copper, Contact Plating=Silver, DatasheetVersion=May-10, Height="12 mm", Length="16 mm", Mount="Through Hole", PackageDescription="2-Pin Surface Mount Device, Body 1.6 x 0.8 mm", PackageReference=HSMW-C191, Packaging=Bulk, Radiation Hardening=No, REACH SVHC=Unknown, RoHSCompliant=true, Width="12 mm"
DS3 DS4: library part CMP-1744-00003-1, "LED Uni-Color Yellow, 65 mW, 20 mA, -40 to 85 degC, 2-Pin SMD, RoHS, Tape and Reel", Case\Package=0603, Case Code (Metric)=1608, Max Operating Temperature="155 degC", Min Operating Temperature="-55 degC", Package Quantity=5000, Power Rating="100 mW", Resistance="390 Ohm", Tolerance=1%, Voltage Rating="50 V", Case Code (Imperial)=0603, ComponentLink1Description="Manufacturer URL", ComponentLink1URL=http://www.avagotech.com/, ComponentLink2Description=Datasheet, ComponentLink2URL=http://docs.avagotech.com/docs/AV02-0551EN, ComponentLink3Description="Package Specification", ComponentLink3URL=http://www.fairchildsemi.com/dwg/MA/MA03D.pdf, DatasheetVersion=Mar-12, Height="0.45 mm", Length="1.6 mm", Mount="Surface Mount", PackageDescription="2-Pin Surface Mount Device, Body 1.6 x 0.8 mm, Height 0.9 mm", PackageReference=HSMX-C190, Packaging="Tape and Reel", Pins=2, REACH SVHC="No SVHC", RoHSCompliant=true, Voltage Rating (DC)="50 V", Width="0.8 mm"
F1: library part "Fuse 2", "Fuse", LatestRevisionDate=17-Jul-2002, LatestRevisionNote="Re-released for DXP Platform.", PackageDescription="Thru-Hole; 2 Leads", PackageReference=PIN-W2/E2.8, Published=8-Jun-2000, Publisher="Altium Limited"
IC3: "Integrated Circuit", Manufacturer_Name=STMicroelectronics, Mouser Part Number=511-LPS22HDTR, Arrow Part Number=LPS22HDTR, Arrow Price/Stock=https://www.arrow.com/en/products/lps22hdtr/stmicroelectronics, Datasheet Link=https://www.st.com/resource/en/datasheet/lps22hd.pdf, Height=0.8mm, Manufacturer_Part_Number=LPS22HDTR, Mouser Price/Stock=https://www.mouser.co.uk/ProductDetail/STMicroelectronics/LPS22HDTR?qs=qVqInAHJvrZgdoVrJXJCrw%3D%3D
IC4: "Integrated Circuit", Manufacturer_Name=Torex, Mouser Part Number=865-XC6227C501MR-G, Arrow Part Number=XC6227C501MR-G, Datasheet Link=https://www.torexsemi.com/file/xc6227/XC6227.pdf, Height=1.3mm, Manufacturer_Part_Number=XC6227C501MR-G, Mouser Price/Stock=https://www.mouser.co.uk/ProductDetail/Torex-Semiconductor/XC6227C501MR-G?qs=AsjdqWjXhJ85%252BgmQqME4lA%3D%3D
IC5 IC6: "Integrated Circuit", Manufacturer_Name="ON Semiconductor", Mouser Part Number=512-FXLP34P5X, Arrow Part Number=FXLP34P5X, Arrow Price/Stock=https://www.arrow.com/en/products/fxlp34p5x/on-semiconductor, Datasheet Link=https://www.onsemi.com/pub/Collateral/FXLP34-D.pdf, Height=1.1mm, Manufacturer_Part_Number=FXLP34P5X, Mouser Price/Stock=https://www.mouser.com/Search/Refine.aspx?Keyword=512-FXLP34P5X
IC7: "Integrated Circuit", Manufacturer_Name=U-Blox, Datasheet Link=https://www.u-blox.com/sites/default/files/SARA-G3_DataSheet_%28UBX-13000993%29.pdf, Manufacturer_Part_Number=SARA-G350-02S
IC8 IC10: "Integrated Circuit", Manufacturer_Name="Texas Instruments", Mouser Part Number=595-TPS7B8233QDGNRQ1, Arrow Part Number=TPS7B8233QDGNRQ1, Arrow Price/Stock=https://www.arrow.com/en/products/tps7b8233qdgnrq1/texas-instruments, Datasheet Link=http://www.ti.com/lit/gpn/tps7b82-q1, Height=1.1mm, Manufacturer_Part_Number=TPS7B8233QDGNRQ1, Mouser Price/Stock=https://www.mouser.co.uk/ProductDetail/Texas-Instruments/TPS7B8233QDGNRQ1?qs=gTYE2QTfZfTgserf%2FHg6KA%3D%3D
IC9: "Integrated Circuit", Manufacturer_Name="Maxim Integrated", Mouser Part Number=700-MAX3488AEGSA+, Arrow Part Number=MAX3488AEGSA+, Datasheet Link=https://datasheets.maximintegrated.com/en/ds/MAX3483AE-MAX3491AE.pdf, Height=1.75mm, Manufacturer_Part_Number=MAX3488AEGSA+, Mouser Price/Stock=https://www.mouser.com/Search/Refine.aspx?Keyword=700-MAX3488AEGSA%2B
IC11: "Integrated Circuit", Manufacturer_Name=Microchip, Mouser Part Number=998-MIC5357-SGYMME, Arrow Part Number=MIC5357-SGYMME, Arrow Price/Stock=https://www.arrow.com/en/products/mic5357-sgymme/microchip-technology, Datasheet Link=http://ww1.microchip.com/downloads/en/DeviceDoc/mic5357.pdf, Height=1.04mm, Manufacturer_Part_Number=MIC5357-SGYMME, Mouser Price/Stock=https://www.mouser.com/Search/Refine.aspx?Keyword=998-MIC5357-SGYMME
J2: library part CMP-2000-05691-1, "Hinged-Style Micro-SIM Card Socket without Detect Switch, Vertical, -30 to 85 degC, 6-Pin SMD, RoHS, Tape and Reel", Manufacturer=Molex, Package Description="6-Pin Subscriber Identity Module Card Socket, Body 16.96 x 13.85 mm", ComponentLink1Description=buy, ComponentLink1URL=https://www.digikey.com/product-detail/en/molex/0788000001/WM9786CT-ND/4172810, ComponentLink2Description=pinout, ComponentLink2URL=https://pinoutguide.com/Memory/SmartCardIso_pinout.shtml, Connector Type=MemorySocket, Contact Material=PhosphorBronze, Contact Plating=GoldPlatedContacts, Datasheet URL=http://www.molex.com/webdocs/datasheets/pdf/en-us/0788000001_MEMORY_CARD_SOCKET.pdf, Datasheet Version=06/2016, Manufacturer URL=http://www.molex.com/, Mounting Technology=SurfaceMount, No. of Contacts=6Contacts, Package Reference=78800-0001, Package URL=http://www.molex.com/pdm_docs/sd/788000001_sd.pdf, Product Range=micro-SIMSeries, SVHC=ToBeAdvised
J3 J4: library part CMP-2000-05490-1, "SMA End Launch Jack Receptacle, 50 Ohm, 0 to 18 GHz, -65 to 165 degC, 5-Pin SMD, RoHS, Bulk", Manufacturer=EmersonConnectivitySolutions, Maximum Frequency=18GHz, Operating Temperature Range=-65Cto+165C, Package Description="5-Pin Surface Mount Device, Body 14.275 x 9.525 mm", Body Material=Brass, Body Style=Straight, Brand=Johnson/EmersonConnectivitySolutions, Connector Type=JackPCB, Contact Plating=Gold, Datasheet URL=https://belfuse.com/resources/Johnson/productinformation/pi-142-0701-801.pdf, Datasheet Version=12/2014, Factory Pack Quantity=5, Gender=Jack(Female), Impedance=50Ohms, Manufacturer URL=http://www.cinch.com/, Mounting Technology=SurfaceMount, Orientation=Straight, Package Reference=142-0701-801, Package URL=https://belfuse.com/resources/Johnson/drawings/dr-1420701801.pdf, Product=Connectors, Product Category=RFConnectors/CoaxialConnectors, RF Series=SMA, RoHS=Details, Series=SMA, Termination Style=Solder
J5 J7: library part CMP-2000-05829-1, "Micro-USB B Receptacle, Vertical, -30 to 85 degC, 5-Pin SMD, RoHS, Tape and Reel", Color=Black, Current Rating=1.8A, Flammability Rating=UL94V-0, Manufacturer=Molex, Package Description="5-Pin Surface Mount Device, Pitch 0.65 mm", Package Version="Rev. C, 11/2015", Voltage - Max=30V, Voltage Rating=30VAC, Brand=Molex, Connector Type=MicroUSBTypeBReceptacle, Contact Material=CopperAlloy, Contact Plating=Gold, Datasheet URL=http://www.molex.com/webdocs/datasheets/pdf/en-us/1051330001_IO_CONNECTORS.pdf, Datasheet Version=03/2016, Factory Pack Quantity=6000, Gender=Receptacle, Manufacturer URL=http://www.molex.com/, Mounting Angle=Vertical, Mounting Style=SMD/SMT, Mounting Technology=SurfaceMount, Number of Ports=1, Package Reference=105133-0001, Package URL=http://www.molex.com/pdm_docs/sd/1051330001_sd.pdf, Packaging=Reel, PartNumber=105133-0001, Product=MicroUSBTypeBConnectors, Product Category=USBConnectors, RoHS=Details, Series=105133, Standard=USB, Termination Style=SolderTail
J6: "Connector", Manufacturer_Name="TE Connectivity", Mouser Part Number=571-1473005-4, Arrow Part Number=1473005-4, Arrow Price/Stock=https://www.arrow.com/en/products/1473005-4/te-connectivity, Datasheet Link=http://docs-emea.rs-online.com/webdocs/06cc/0900766b806ccc0f.pdf, Manufacturer_Part_Number=1473005-4, Mouser Price/Stock=https://www.mouser.co.uk/ProductDetail/TE-Connectivity/1473005-4?qs=VZ9FDhhp7Sl6t6qwUOr3aA%3D%3D
J8: "Connector", Manufacturer_Name=Sullins, Arrow Part Number=SBH11-PBPC-D05-RA-BK, Datasheet Link=http://sullinscorp.com/catalogs/145_PAGE118_.100_SBH11_SERIES_MALE_BOX_HDR_ST_RA_SMT.pdf, Height=8.8mm, Manufacturer_Part_Number=SBH11-PBPC-D05-RA-BK
L3: library part CMP-2000-06702-1, "Chip Ferrite Bead, 1.5 A, -40 to 125 degC, 2-Pin SMD (0805), RoHS, Tape and Reel", Current Rating (Max)=1.5A, DC Resistance (DCR) (Max)=50mOhm, Impedance @ Frequency=40Ohm@100MHz, Manufacturer=Laird, Operating Temperature=-40°C~125°C, Package / Case=0805(2012Metric), Package Description="2-Pin Surface Mount Device, Body 2 x 1.25 mm", Ratings=-, Standard Package=1, Catalog Drawings=(HI,HZ,LI,MI)0805Series_1.10mmMax.Height, Category=Filters, Datasheet URL=http://download.siliconexpert.com/pdfs2/2015/9/8/2/39/55/778/laird_/auto/f.pdf, Datasheet Version="Rev. D, 08/2013", Family=FerriteBeadsandChips, Filter Type=PowerLine, Height (Max)="0.043\"(1.10mm)", Kits=240-2227-ND-KITEMIFERRITEBEADCHIPSMD, Manufacturer URL=https://www.lairdtech.com/, Mounting Technology=SurfaceMount, Mounting Type=SurfaceMount, Number of Lines=1, Online Catalog=MISeries, Other Names=240-2389-1, Package Reference=MI0805K400R-10, Packaging=CutTape(CT), Series=MI, Size / Dimension="0.079\"Lx0.049\"W(2.00mmx1.25mm)"
LoRa P1: "Header, 2-Pin", LatestRevisionDate=17-Jul-2002, LatestRevisionNote="Re-released for DXP Platform.", Publisher="Altium Limited"
P2: library part CMP-1755-00007-1, "Male Header, Pitch 2.5 mm, 1 x 4 Position, Height 6.1 mm, Tail Length 3.4 mm, -25 to 85 degC, RoHS, Bulk", ComponentLink1Description="Manufacturer URL", ComponentLink1URL=http://www.jst.com/home2.html, ComponentLink2Description=Datasheet, ComponentLink2URL=http://www.jst-mfg.com/product/pdf/eng/eXH.pdf, DatasheetVersion=May-16, PackageDescription="Male Header, Pitch 2.5 mm, 1 x 4 Position, Height 6.1 mm, Tail Length 3.4 mm", PackageReference=S4B-XH-A(LF)(SN)
P4: "Header, 20-Pin", LatestRevisionDate=17-Jul-2002, LatestRevisionNote="Re-released for DXP Platform.", Publisher="Altium Limited"
P5: "Header, 4-Pin", LatestRevisionDate=17-Jul-2002, LatestRevisionNote="Re-released for DXP Platform.", Publisher="Altium Limited"
Q1: library part CMP-2000-04935-1, "Digital FET, N-Channel, 0.35 W, 25 V, -55 to 150 degC, 3-Pin SOT23, RoHS, Tape and Reel", Continuous Drain Current Id=220mA, Current Temperature=25degC, Drain Source Voltage Vds=25V, Manufacturer=Fairchild, On Resistance Rds(on)=5ohm, Operating Temperature Max=150degC, Operating Temperature Min=-55degC, Operating Temperature Range=-55degCto+150degC, Package / Case=SOT-23, Package Description="3-Pin Small Outline Transistor, Body 2.92 x 1.325 mm, Pitch 0.95 mm", Package Reference=SOT23-3, Package Version="Rev. 12, 03/2016", Power Dissipation Pd=350mW, Pulse Current Idm=500mA, Rds(on) Test Voltage Vgs=2.7V, Threshold Voltage Vgs Typ=850mV, Voltage Vgs Rds on Measurement=4.5V, Voltage Vgs th Max=1.5V, ComponentLink1Description=datasheety, ComponentLink1URL=https://www.onsemi.com/pub/Collateral/FDV301N-D.PDF, Current Id Max=220mA, Datasheet URL=https://datasheet.ciiva.com/8114/fdv301n-8114688.pdf, Datasheet Version=Jun-09, ESD HBM=6kV, External Depth=2.5mm, External Length / Height=1.12mm, External Width=3.05mm, Full Power Rating Temperature=25degC, Manufacturer URL=https://www.fairchildsemi.com/, No. of Pins=3, No. of Transistors=1, Package URL=http://www.fairchildsemi.com/dwg/MA/MA03D.pdf, Reel Quantity=3000, SMD Marking=301, SVHC=NoSVHC(19-Dec-2012), Tape Width=8mm, Termination Type=SMD, Transistor Case Style=SOT-23, Transistor Polarity=NChannel, Voltage Vds Typ=25V, Voltage Vgs Max=850mV
Q2: "MOSFET (P-Channel)", Manufacturer_Name=Toshiba, Mouser Part Number=757-SSM3J338RLF, Arrow Part Number=SSM3J338R,LF, Arrow Price/Stock=https://www.arrow.com/en/products/ssm3j338rlf/toshiba, Datasheet Link=http://toshiba.semicon-storage.com/info/docget.jsp?did=30384&prodName=SSM3J338R, Manufacturer_Part_Number=SSM3J338R,LF, Mouser Price/Stock=https://www.mouser.co.uk/ProductDetail/Toshiba/SSM3J338RLF?qs=lhkzy8lC%252BSvURFM9ZjmJSw%3D%3D
Q3: library part CMP-1259-00082-1, "N-Channel Trench MOSFET, 60 V, 0.36 A, -55 to 150 degC, 3-Pin SOT23, Tape and Reel", Manufacturer="NXP Semiconductors", Automotive Qualified=Y, Channel Type=N, Code_JEDEC=TO-236AB, ComponentLink1Description="Manufacturer URL", ComponentLink1URL=http://www.nxp.com/, ComponentLink2Description=Datasheet, ComponentLink2URL=http://www.nxp.com/documents/data_sheet/2N7002P.pdf, ComponentLink3Description="Package Specification", ComponentLink3URL=http://www.nxp.com/documents/outline_drawing/sot023_po.pdf, DatasheetVersion="Rev. 02", ID [max] (A)=0.36, IDM [max] (A)=1.2, Mounting Technology="Surface Mount", PackageDescription="3-Pin Small Outline Transistor Package, Body 2.9 x 1.3 mm, Pitch 0.95 mm", PackageReference=SOT23, PackageVersion="06-03-16, 03/2006", Packing="Tape & Reel", PartNumber=2N7002P,215, VDS [max] (V)=60, VGSth [typ] (V)=1.75
Q4: library part CMP-2000-07450-1, "N-Channel Enhancement Mode MOSFET, 20 V, 630 mA, -55 to 150 degC, 3-Pin SOT23, RoHS, Tape and Reel", Case\/Package=SOT-523, Continuous Drain Current (ID)=630mA, Drain to Source Breakdown Voltage=20V, Drain to Source Resistance=300mOhm, Gate to Source Voltage (Vgs)=6V, Input Capacitance=60.67pF, Manufacturer="Diodes Inc", Max Operating Temperature=150degC, Max Power Dissipation=280mW, Min Operating Temperature=-55degC, On-State Resistance=400MOhm, Package Description="3-Pin Small Outline Transistor, Body 1.6 x 0.8 mm, Pitch 0.5 mm", Package Quantity=3000, Package Reference=SOT523-3, Threshold Voltage=1V, Contact Plating=Matte, Datasheet URL=https://www.diodes.com/assets/Datasheets/ds31783.pdf, Datasheet Version="Rev. 3-2, 01/2012", Drain to Source Voltage (Vdss)=20V, Element Configuration=Single, Fall Time=12.3ns, Height=0.8mm, Lead Free=LeadFree, Length=1.7mm, Manufacturer URL=http://www.diodes.com/, Mount=SurfaceMount, Mounting Technology=SurfaceMount, Number of Channels=1, Number of Elements=1, Number of Pins=3, Packaging=TapeandReel, Power Dissipation=280mW, Radiation Hardening=No, Rds On Max=400mOhm, REACH SVHC=NoSVHC, Rise Time=7.4ns, RoHSCompliant=true, Turn-Off Delay Time=26.7ns, Turn-On Delay Time=5.1ns, Weight=7.1E-05oz, Width=0.85mm
Q5: library part CMP-1099-00018-1, "P-Channel SIPMOS Small-Signal-Transistor, -100 V VDS, -1 A ID, -55 to 150 degC, PG-SOT223 (SC-73), Reel, Green", Manufacturer=Infineon, ComponentLink1Description="Manufacturer URL", ComponentLink1URL=http://www.infineon.com/, ComponentLink2Description=Datasheet, ComponentLink2URL=http://www.infineon.com/dgdl/BSP322P_Rev15.pdf?folderId=db3a304314dca38901154a72e3951a65&fileId=db3a30433b47825b013b60a022246d9c, ComponentLink3Description="Package Specification", ComponentLink3URL=http://www.infineon.com/dgdl/SOT223-Package_Overview.pdf?folderId=db3a30431936bc4b0119530470b03c3d&fileId=db3a30431936bc4b0119531d40b93c5c, DatasheetVersion="Rev. 1.05", Green=TRUE, Halogen-free=TRUE, ID (max)="-1Â A", IDpuls (max)="-4Â A", Mode=Enhancement, Mounting Technology="Surface Mount", PackageDescription="4-Pin Small Outline Transistor Package, 6.5 x 3.5 mm Body, 2.3 mm Pitch", PackageReference="PG-SOT223 (SC-73)", PackageVersion=Apr-08, Packing=Reel, PartNumber=BSP322P, Polarity=P, Pto t (max)="1.8Â W", QG="12.4Â nC", RDS (on) (max)="800Â mOhm", RDS (on) (max) (@4.5V)="1,000Â mOhm", Rth="115Â K/W", Technology=SIPMOS, VDS (max)="-100Â V", VGS(th) (max)="-1Â V", VGS(th) (min)="-2Â V"
R3 R4 R5 R9 R10 R20 R23 R24 R25 R26 R28 R29 R30 R31 R32 R33: library part Res1, "Resistor", LatestRevisionDate=17-Jul-2002, LatestRevisionNote="Re-released for DXP Platform.", PackageDescription="Axial Device, Thru-Hole; 2 Leads; 0.3 in Pin Spacing", PackageReference=AXIAL-0.3, Published=8-Jun-2000, Publisher="Altium Limited"
R7 R22 R27: library part CMP-2002-07344-1, Manufacturer="Yageo / Phycomp", Part Number=RC0402FR-07100RL, spec=100
R8: library part CMP-2002-07343-1, Manufacturer="Yageo / Phycomp", Part Number=RC0402FR-07100KL, spec=100k
SW1: library part CMP-1435-00001-1, "WS-DITV 2.54 mm Compact THT Dip Switch with Raised Actuator", Manufacturer="Wuerth Elektronik", ComponentLink1Description="Manufacturer URL", ComponentLink1URL=http://www.we-online.com, ComponentLink2Description=Datasheet, ComponentLink2URL=http://katalog.we-online.de/em/datasheet/4181172709xx.pdf, NoPins=2, PackageReference=418117270901, PartNumber=418117270901
U1 U2: library part CMP-2000-06606-1, "iNEMO Inertial Module: 3D Accelerometer, 3D Gyroscope, 3D Magnetometer, 1.9 to 3.6 V, -40 to 85 degC, 24-Pin LGA, RoHS, Tape and Reel", Manufacturer=STMicroelectronics, Package Description="24-Pin Plastic Land Grid Array Package, Body 3.65 x 3.15 mm, Pitch 0.43 mm", Package Reference=LGA-24_3500X3000X1000, PartNumber=LSM9DS1, Sensor Case Style=LGA, Supply Voltage Max=3.6V, Supply Voltage Min=1.9V, Acceleration Range=±2g,±4g,±8g,±16g, Datasheet URL=http://www2.st.com/content/ccc/resource/technical/document/datasheet/1e/3f/2a/d6/25/eb/48/46/DM00103319.pdf/files/DM00103319.pdf/jcr:content/translations/en.DM00103319.pdf, Datasheet Version="Rev. 3, 03/2015", Gyroscope Range=±245°/s,±500°/s,±2000°/s, Manufacturer URL=http://www.st.com/, MEMS Module Function=Tri-AxisGyroscope,Tri-AxisAccelerometer,Tri-AxisMagnetometer, Mounting Technology=SurfaceMount, MSL=MSL3-168hours, No. of Pins=24Pins, Packaging=CutTape, Product Range=-, SVHC=NoSVHC(17-Dec-2015)
U3: "Undefined or Miscellaneous", Manufacturer_Name=U-Blox, Arrow Part Number=MAX-M8C-0-10, Datasheet Link=https://www.u-blox.com/sites/default/files/MAX-M8-FW3_DataSheet_%28UBX-15031506%29.pdf, Manufacturer_Part_Number=MAX-M8C-0-10
U4: library part CMP-0250-00007-1, "Quad Serial UART with 128-Word FIFO, 48-Pin TQFN, -40°C to +85°C, Pb-Free", ComponentLink1Description="Manufacturer URL", ComponentLink1URL=http://www.maxim-ic.com, ComponentLink2Description=Datasheet, ComponentLink2URL=http://datasheets.maxim-ic.com/en/ds/MAX14830.pdf, ComponentLink3Description="Package Specification", ComponentLink3URL=http://pdfserv.maxim-ic.com/package_dwgs/21-0144.PDF, DatasheetVersion="Rev 2, Sep-2011", PackageDescription="48-Pin Thin Quad Flatpack, No Leads, 7 x 7 x 0.75 mm Body, 0.5 mm Pitch, TQFN, Pb-Free", PackageReference=T4877+3, PackageVersion="revI, 2009"
X1: library part CMP-0277-00002-1, "Low Profile Surface Mount Microprocessor Crystal, 4.096 MHz +/-30 ppm, 180 Ohm, -40 to 85 degC, 2-Pin 11.4 x 4.7 x 3.3 mm SMD, RoHS, Tape and Reel", Freq. Stability="+/- 30 ppm", Frequency="4.096 MHz", Load Capacitance="18 pF", Manufacturer=Abracon, Operating Temp. Range="-40 to 85 degC", PartNumber=ABLS2-4.096MHZ-D4Y-T, Shunt Capacitance="7 pF Max.", ComponentLink1Description="Manufacturer URL", ComponentLink1URL=http://www.abracon.com/, ComponentLink2Description=Datasheet, ComponentLink2URL=http://www.abracon.com/Resonators/ABLS2.pdf, DatasheetVersion="Rev. 03.31.11", ESR="180 Ohm", Freq. Tolerance="+/- 30 ppm", Mounting Technology="Surface Mount", Operation Mode="Fundamental or 3rd Overtone", PackageDescription="2-Pin SMD, Body 11.4 x 4.7 mm, Height 3.3 mm", PackageReference=ABLS2-2, Packing="Tape and Reel", RoHS=TRUE

## Free pads (board coordinates)
  round 118.11 hole 118.11: 11(250,250) 11(250,2750) 11(2750,250) 11(2750,2750)

## Via types
v1: diameter 19.68, hole 7.87, Top Layer to Bottom Layer, 25 vias

## Nets (pads, with @x,y where several pads share a name; then routed paths per layer and width w, separated by ;. In a path a pad name is that pad's centre, name@x,y a point inside that pad or via, vN(x,y) a via of type N, cw(c..) or ccw(c..) an arc to the next point about the centre after c; other vN are vias at no path point)
1.8V: C40.2 C55.2 C56.1 C57.1 C58.1 C59.1 IC11.7 J6.183 J6.184 J6.185 J6.186 R31.2
3.3_COMMS_EN: IC10.2 J6.59
3.3_GPS_EN: IC8.2 J6.57
3.3V: C41.2 C50.2 C51.1 C52.1 C53.1 C54.1 DS3.1 IC11.4 IC11.8 J6.39 J6.40 J6.41 J6.42 J6.189 J6.190 J6.191 J6.192 J6.193 J6.194 R25.1 R26.1 R30.1
3.8_SARA_EN: IC4.3 J6.48
5_FUSE: DS2.1 F1.1 Q2.3
5V: C22.2 C42.2 DS1.1 F1.2 IC8.1 IC11.1 L3.1 P5.4 Q4.1 Q5.3 R33.2
5V_COMPUTE: C45.1 C46.2 C47.1 C48.1 C49.1 IC11.5 J6.197 J6.198 J6.199 J6.200 J8.2 L3.2
5V_RAW: C44.2 J5.1 P4.13 P4.14 Q2.2 R20.2
+1.8_SARA_OUT: IC5.5 IC6.1 IC7.4 R4.2 R5.2
+3.3_ADC_BARO_ACC: C1.2 C2.2 C5.2 C6.2 C12.2 C13.2 IC3.1 IC3.6 IC3.10 U1.1 U1.3 U1.5 U1.6 U1.7 U1.8 U1.13 U1.22 U1.23 U2.1 U2.3 U2.5 U2.6 U2.7 U2.8 U2.13 U2.22 U2.23
+3.3_GPS: C21.2 C23.1 C24.1 C25.2 C26.2 C27.2 IC5.1 IC6.5 IC8.8 U3.6 U3.7 U3.8 U3.9 U3.18
+3.3_MAX3488_MAX14830: C28.2 C29.2 C30.2 C32.2 IC9.1 IC10.8 U4.1 U4.2 U4.8 U4.9 U4.43 U4.47